# Altium PCB INDICATOR_MEZ.PcbDoc
Units mil, origin at the board's own origin, x right, y up, seen from the top; angles counter-clockwise.
Board outline 2794 x 3150 mil, 2 copper layers (Top Layer, Bottom Layer); 3 components, 9 nets, 21 pads, 0 vias.
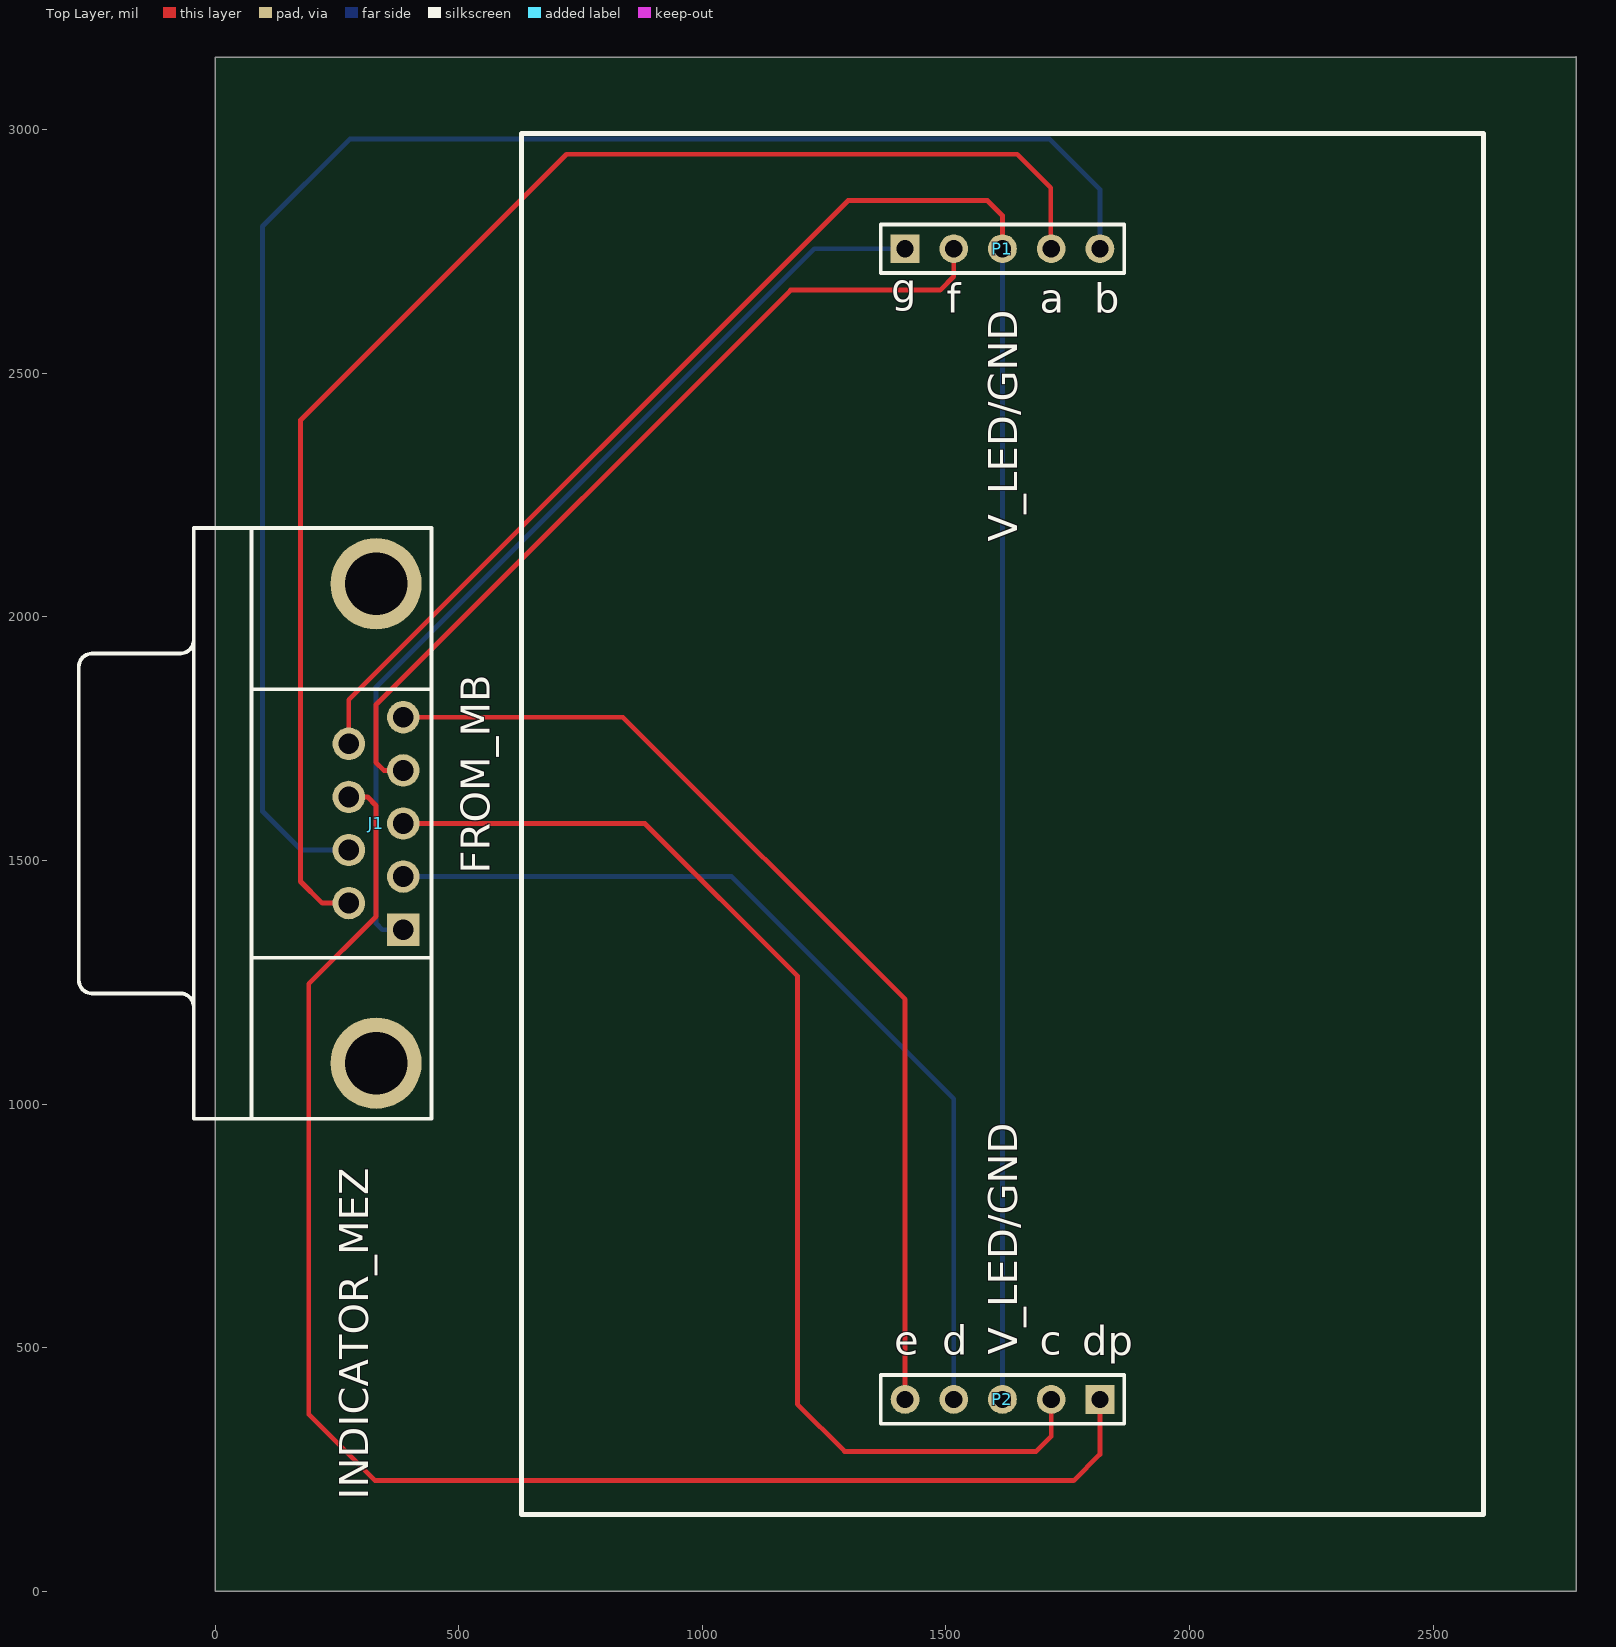
[diagram p0: Top Layer view]
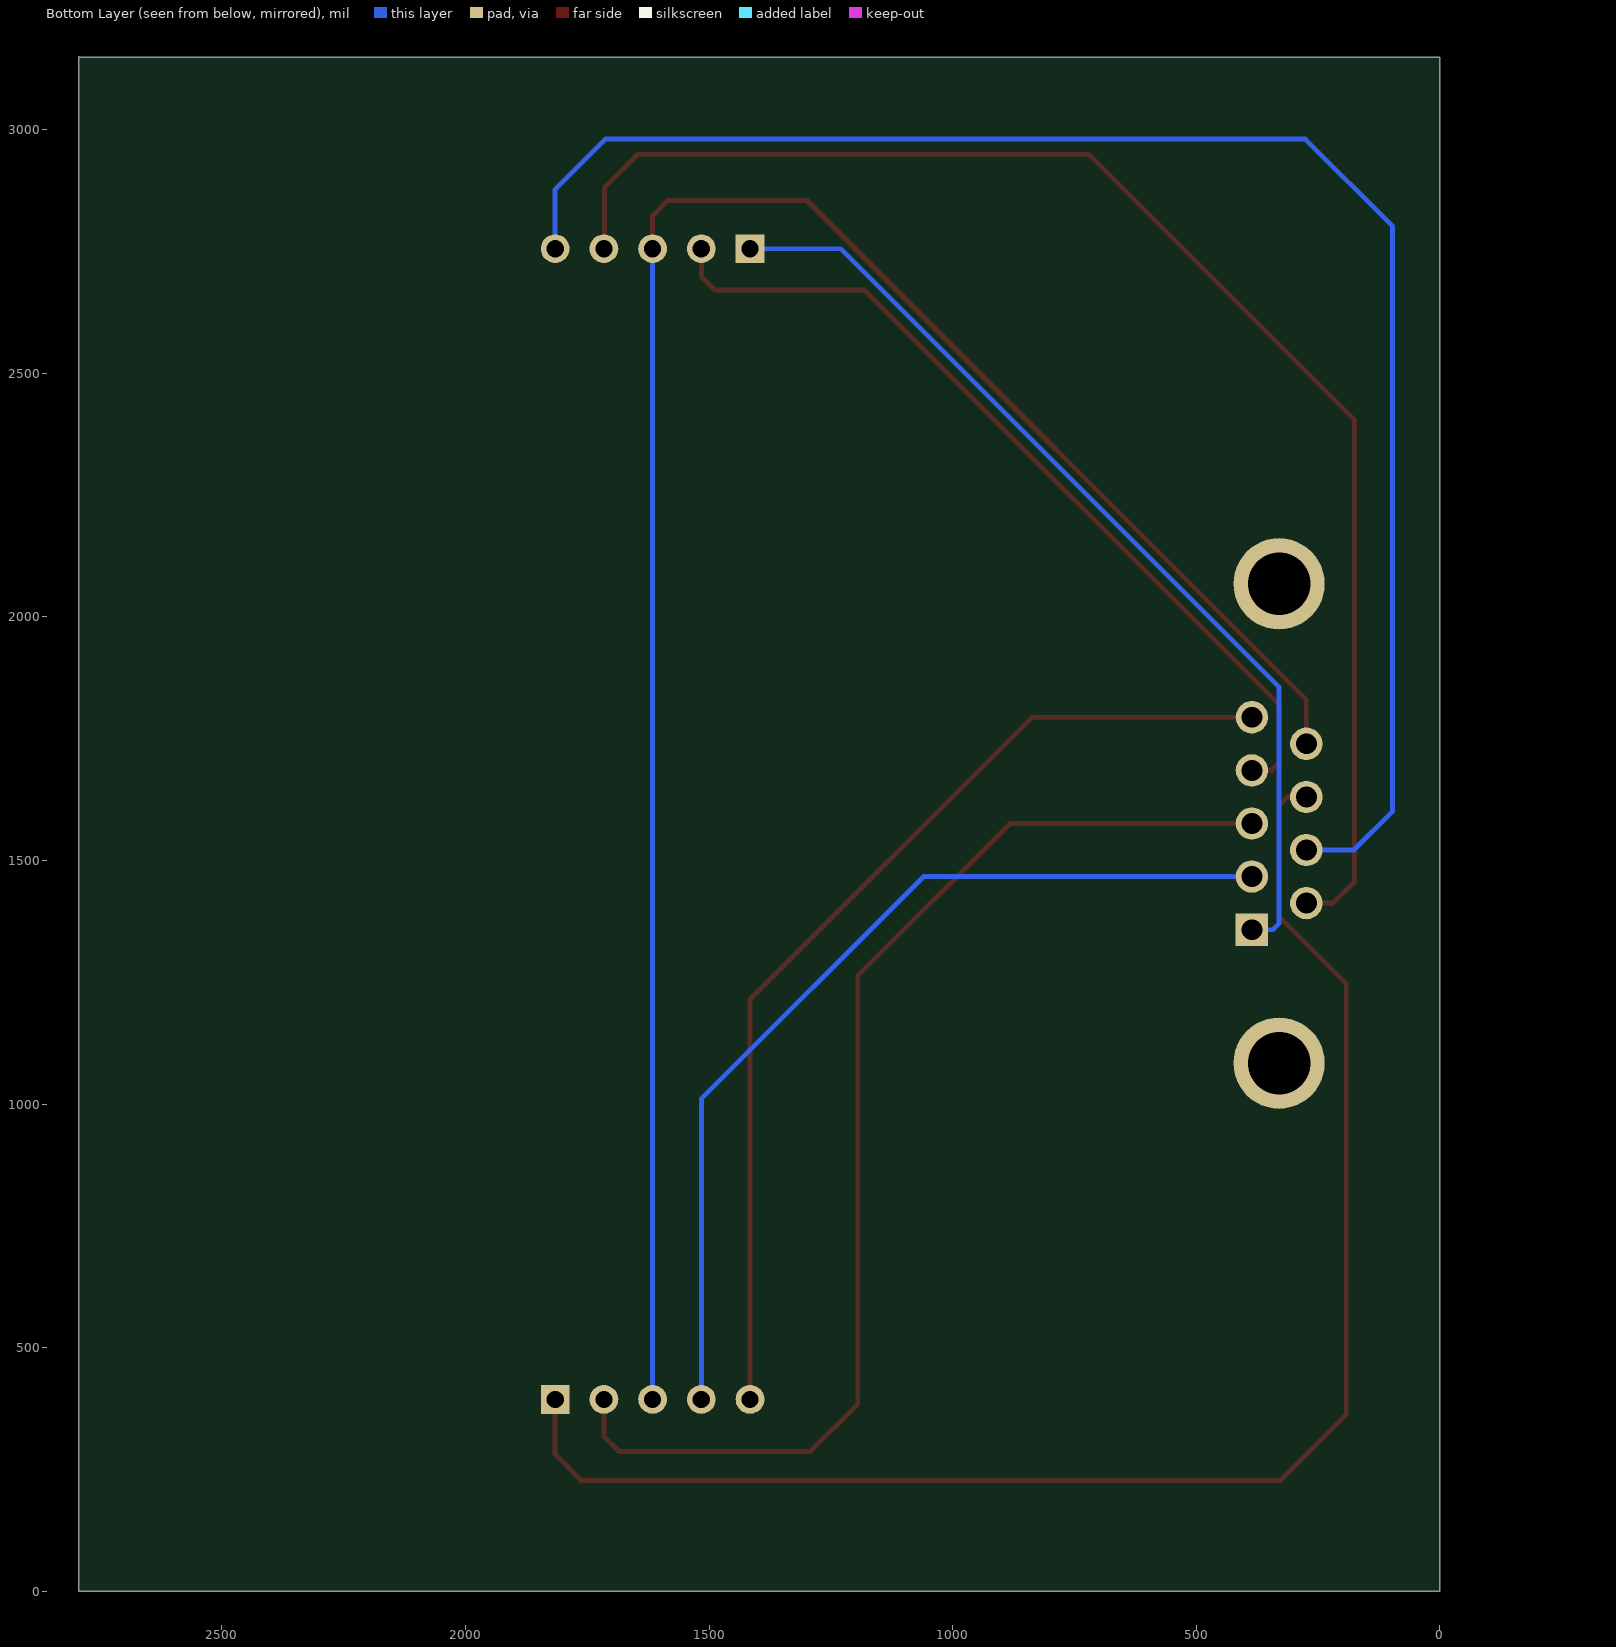
[diagram p1: Bottom Layer view, seen from below]

## Layer stack, top to bottom
Top Solder: solder mask 0.4, Solder Resist, Dk 3.5
Top Layer: signal copper 1.4
Dielectric 1: dielectric 12.6, FR-4, Dk 4.8
Bottom Layer: signal copper 1.4
Bottom Solder: solder mask 0.4, Solder Resist, Dk 3.5

## Board outline
0,0 2794,0 2794,3150 2793,3149 0,3149

## Design rules (kind name [scope] priority, off if disabled: settings)
Clearance [All] p1: gap=10 ignorepadtopadclearanceinfootprint=FALSE except(0: Arc-Hole Track-Hole SMDPad-Hole THPad-Hole Via-Hole Fill-Hole Poly-Hole Region-Hole Text-Hole)
PolygonConnect [All] p1: connectstyle=Relief reliefconductorwidth=10 reliefentries=4 polygonreliefangle="90 Angle" airgapwidth=10
RoutingVias [All] p1: holewidth=28 width=50 viastyle="Through Hole" minholewidth=28 minwidth=50 maxholewidth=28 maxwidth=50
SolderMaskExpansion [All] p1: expansion=4
Width [All] p1: maxlimit=10 minlimit=10 preferedwidth=10
30 further rules are at their usual default settings.

## Components (designator, comment, footprint, x,y, rotation, side; value= is the part's Value field where it differs from the comment)
J1 "D Connector 9" DSUB1.385-2H9 -44.02,1576.07 r90 top
P1 "Header 5" HDR1X5 1416,2756 r0 top
P2 "Header 5" HDR1X5 1816,393.8 r180 top

## Footprints (in the part's own frame and the unit in brackets; to place one, negate y for a bottom-side part, rotate by r counter-clockwise, add the part's x,y. Pads: shape width x height; smd on the part's side, far side on the other; paste and mask are expansions set on the pad)
DSUB1.385-2H9 [mm] "Connector; D Subminiature; 9 Position; Right Angle; Pitch 1.385 mm"
  rect 1.69x1.69 hole 1.09: 1(-5.54,-10.92)
  round 1.69 hole 1.09: 2(-2.77,-10.92) 3(0,-10.92) 4(2.77,-10.92) 5(5.54,-10.92) 6(-4.155,-8.08) 7(-1.385,-8.08) 8(1.385,-8.08) 9(4.155,-8.08)
  round 4.76 hole 3.26: 10(-12.495,-9.5) 11(12.495,-9.5)
  silkscreen extent -15.4,-12.4 15.4,6
HDR1X5 [mm] "Connector; Header; 5 Position"
  rect 1.5x1.5 hole 0.9: 1(0,0)
  round 1.5 hole 0.9: 2(2.54,0) 3(5.08,0) 4(7.62,0) 5(10.16,0)
  silkscreen extent -1.27,-1.27 11.43,1.27

## Part data
J1: "Receptacle Assembly, 9 Position, Right Angle", PackageDocument=O, DatasheetDocument=1-Sep-1999, Gender=Receptacle, LatestRevisionDate=17-Jul-2002, LatestRevisionNote="Re-released for DXP Platform.", Orientation="Right Angle", PackageReference=788750, Positions=9, Published=15-Jun-2001, Publisher="Altium Limited"
P1 P2: "Header, 5-Pin", LatestRevisionDate=17-Jul-2002, LatestRevisionNote="Re-released for DXP Platform.", Publisher="Altium Limited"

## Nets (pads, with @x,y where several pads share a name; then routed paths per layer and width w, separated by ;. In a path a pad name is that pad's centre, name@x,y a point inside that pad or via, vN(x,y) a via of type N, cw(c..) or ccw(c..) an arc to the next point about the centre after c; other vN are vias at no path point)
a: J1.6 P1.4 | length 2984.7
  Top Layer w10: J1.6 219.51,1412.49 175,1457 175,2404 721,2950 1646,2950 1715,2881 1715,2757 P1.4
b: J1.7 P1.5 | length 3368.8
  Bottom Layer w10: J1.7 176.46,1521.54 97,1601 97,2802 276,2981 1713,2981 1816,2878 P1.5
c: J1.3 P2.2 | length 2467.6
  Top Layer w10: J1.3 881.93,1576.07 1194.86,1263.14 1194.86,384.14 1292,287 1685,287 1716,318 P2.2
d: J1.2 P2.4 | length 1936.2
  Bottom Layer w10: J1.2 1060,1467 1516,1011 P2.4
dp: J1.8 P2.1 | length 3185.9
  Top Layer w10: J1.8 312.4,1630.6 330,1613 330,1385 192,1247 192,363 328,227 1762,227 1816,281 P2.1
e: J1.5 P2.5 | length 2091.2
  Top Layer w10: J1.5 836.82,1794.18 1416,1215 P2.5
f: J1.4 P1.2 | length 1788.6
  Top Layer w10: J1.4 345.87,1685.13 330,1701 330,1820 1181,2671 1488,2671 1516,2699 P1.2
g: J1.1 P1.1 | length 2005.1
  Bottom Layer w10: J1.1 343.04,1357.96 330,1371 330,1856 1230,2756 P1.1
V_LED/GND_TO_A: J1.9 P1.3 P2.3 | length 4299.9
  Top Layer w10: J1.9 274.09,1830.09 1299,2855 1585,2855 1616,2824 P1.3
  Bottom Layer w10: P2.3 P1.3
pads on no net: J1.10 J1.11

## Polygon pours and split planes (outlines as drawn)
no net on Bottom Layer "NONET_L02_P004" (hatched Horizontal grid 20 track 8, remove dead copper, pour order 4): 75,76
no net on Bottom Layer "NONET_L02_P002" (solid, remove dead copper, pour order 2): 75,76

## Silkscreen, mask and mechanical layers (free items; w line width, h text height)
Top Overlay:
  lines w10: 2603.4,2983.22 2603.4,2985.92 ; 2603.4,2985.92 2603.4,2991.92 2603.1,2992.22 628.6,2992.22 628.6,393.8 628.6,157.57 1816,157.57 2603.4,157.57 2603.4,393.8 2603.4,2756 2603.4,2985.92
  text "g" at 1388,2645 h60
  text "f" at 1502,2625.01 h60
  text "a" at 1692,2625.01 h60
  text "b" at 1804,2625.01 h60
  text "V_LED/GND" at 1646,2154 h60 r90
  text "FROM_MB" at 563,1473 h60 r90
  text "e" at 1394,485.01 h60
  text "d" at 1492,485.01 h60
  text "V_LED/GND" at 1646,485.01 h60 r90
  text "c" at 1693,485.01 h60
  text "dp" at 1780,484 h60
  text "INDICATOR_MEZ" at 314,188 h60 r90
Mechanical 1:
  lines w10: 0,0.09 2794,0.09 2794,3149.7 0,3149.7 0,0.09